# Altium PCB convertpcb.PcbDoc
Units mm, origin at the board's own origin, x right, y up, seen from the top; angles counter-clockwise.
Board outline 30.99 x 32 mm, 2 copper layers (Top Layer, Bottom Layer), stack 1.58 mm thick; 4 components, 19 nets, 70 pads, 0 vias.
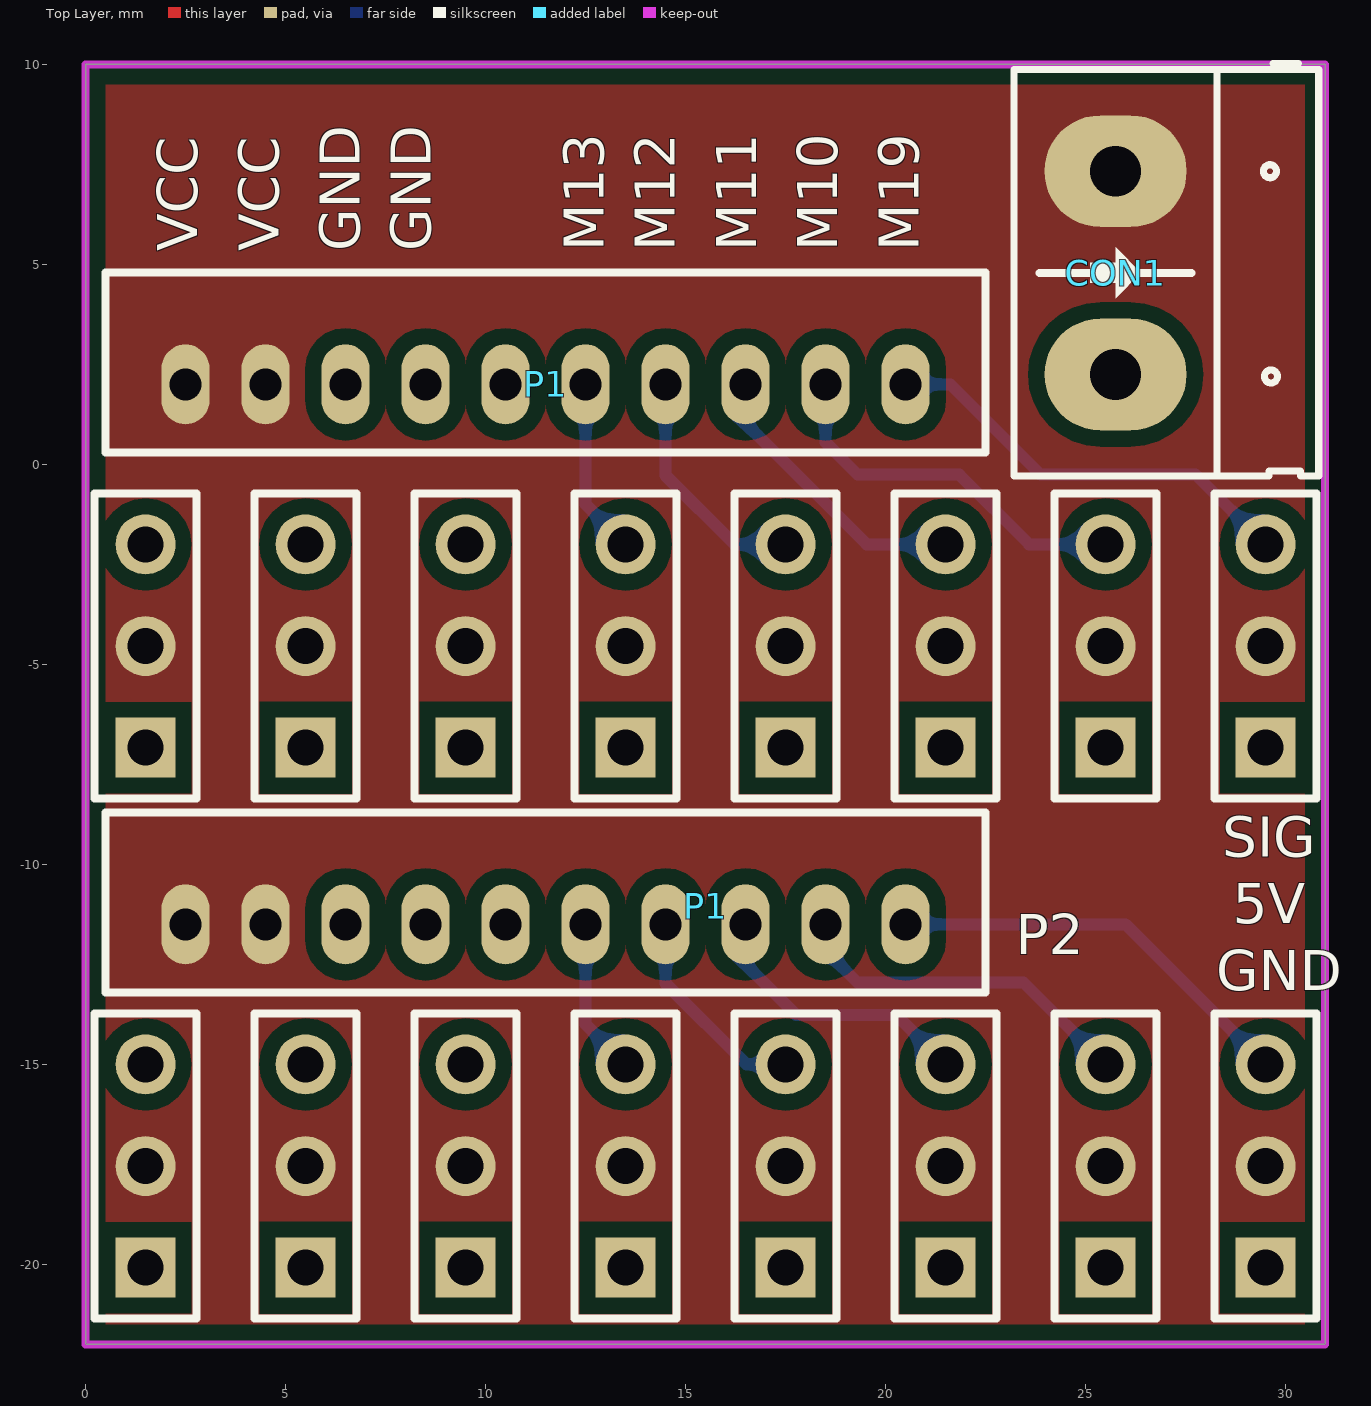
[diagram p0: Top Layer view]
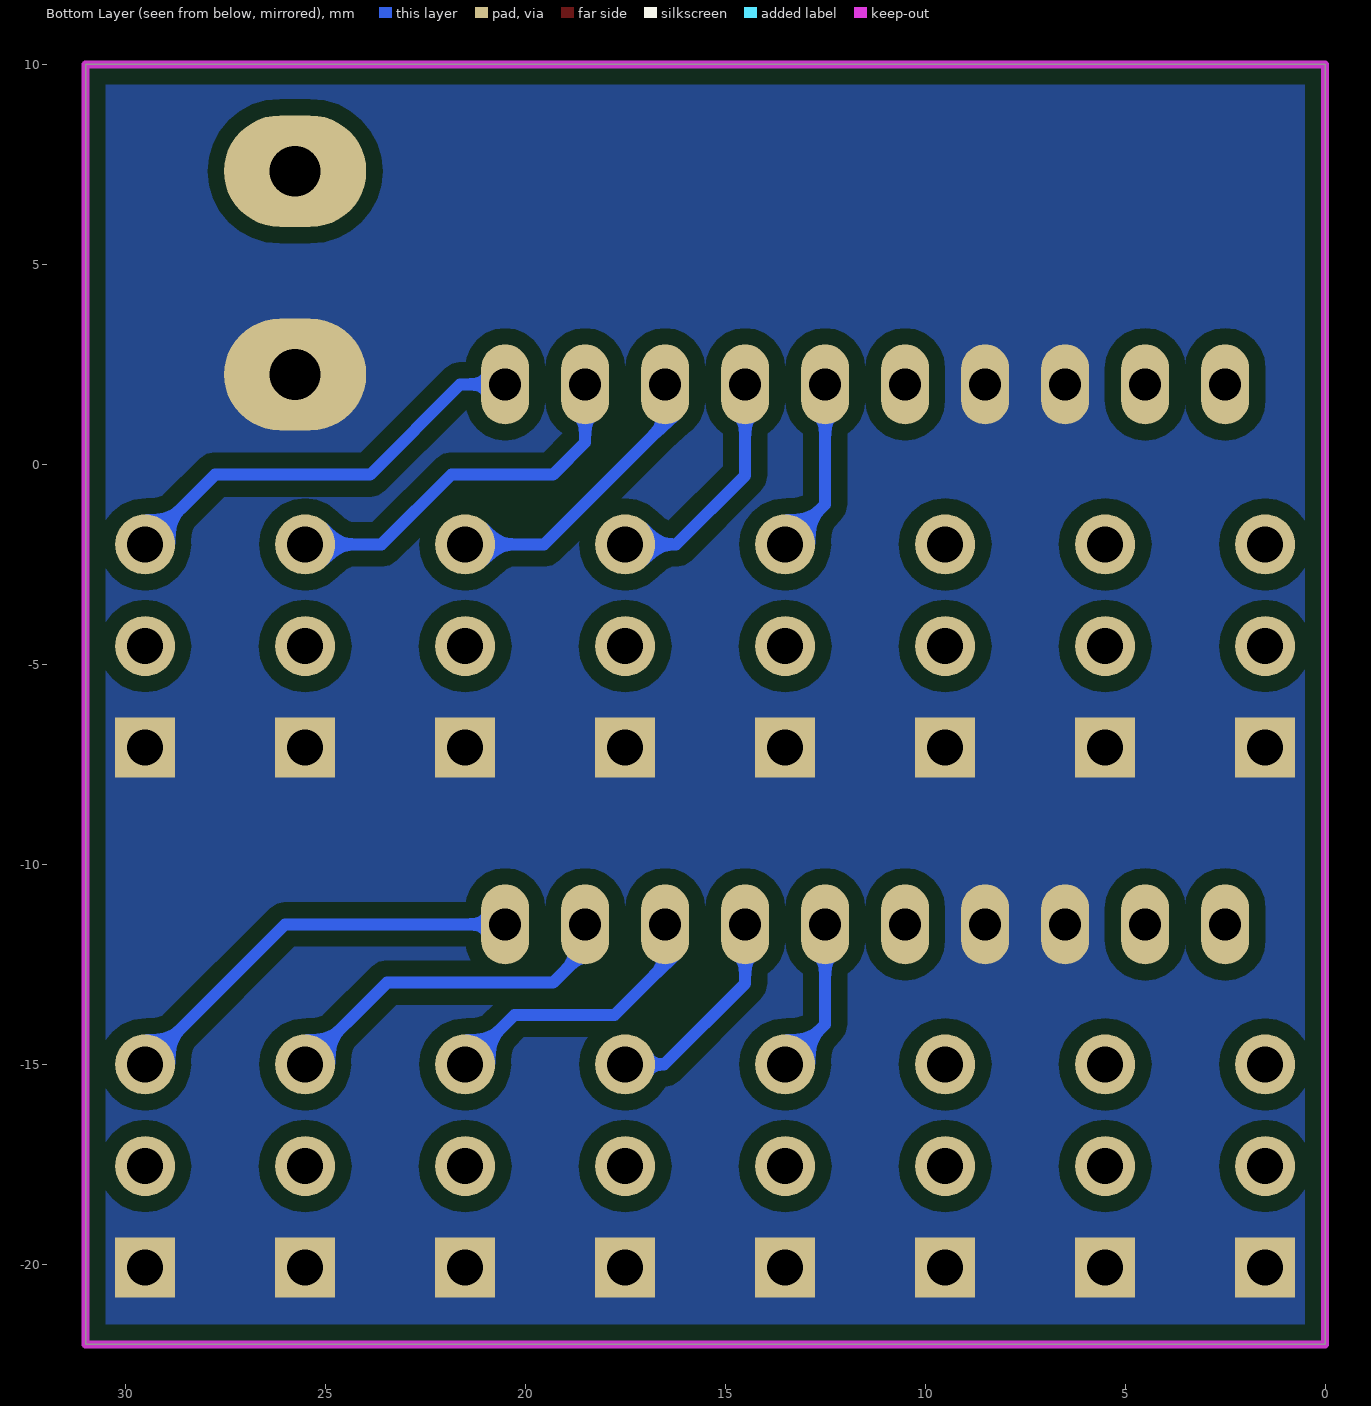
[diagram p1: Bottom Layer view, seen from below]
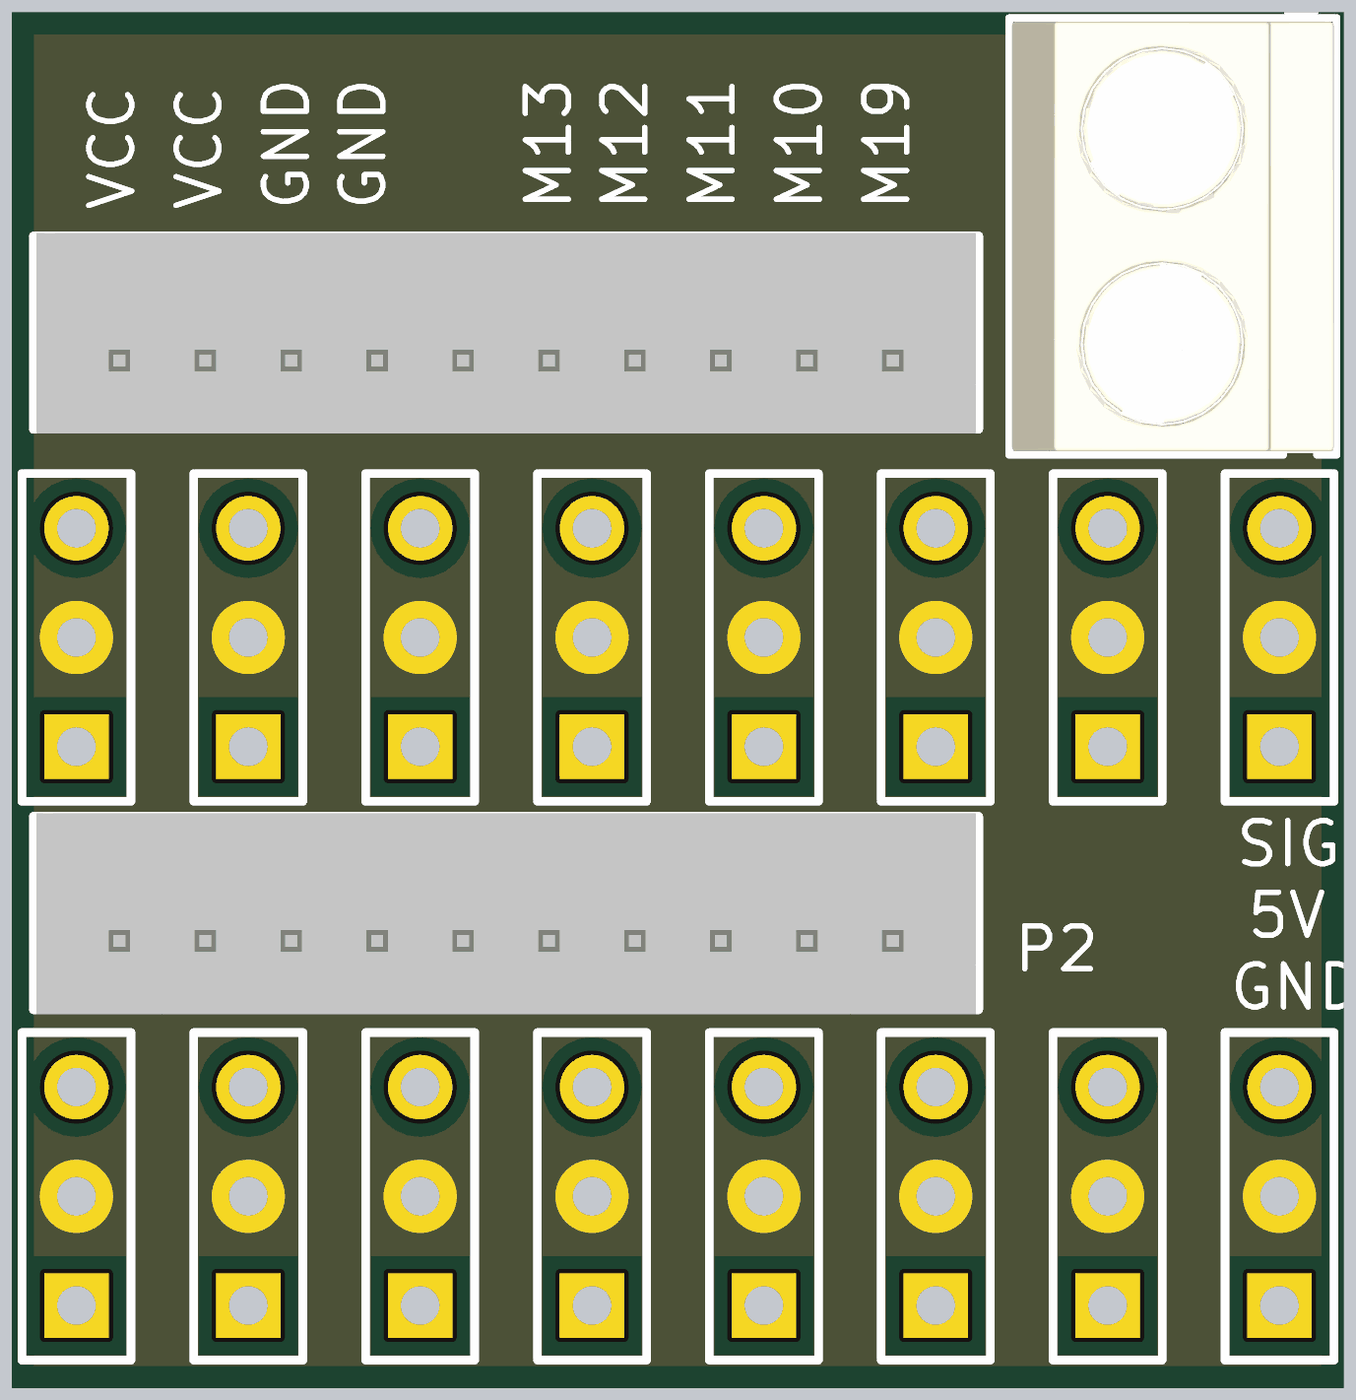
[diagram p2: 3D render of the assembled board from above, using the file's embedded part models]

## Layer stack, top to bottom
Top Solder: solder mask 0.0102, Solder Resist, Dk 3.5
Top Layer: signal copper 0.0356
Dielectric 1: dielectric 1.5086, FR-4, Dk 4.8
Bottom Layer: signal copper 0.0356
Bottom Solder: solder mask 0.0102, Solder Resist, Dk 3.5

## Board outline
0,-22 0,10 30.99,10 30.99,-22

## Design rules (kind name [scope] priority, off if disabled: settings)
Clearance [All] p1: gap=0.4
HoleSize [All] p1: absolutevalues=TRUE maxlimit=5 minlimit=0.01 maxpercent=80.000 minpercent=20.000
MinimumSolderMaskSliver [All] p1: minsoldermaskwidth=0.01
PolygonConnect [All] p1: connectstyle=Direct reliefconductorwidth=0.254 reliefentries=4 polygonreliefangle="90 Angle" airgapwidth=0.254
RoutingVias [All] p1: holewidth=0.3 width=0.6 viastyle="Through Hole" minholewidth=0.3 minwidth=0.6 maxholewidth=5 maxwidth=5
SilkToSilkClearance [All] p1: silktosilkclearance=0.1
SilkToSolderMaskClearance [IsPad] p1: minsilkscreentomaskgap=0.01 clearancetoexposedcopper=TRUE
SolderMaskExpansion [All] p1: expansion=0.102
Width [All] p1: maxlimit=5 minlimit=0.254 preferedwidth=0.254
26 further rules are at their usual default settings.

## Components (designator, comment, footprint, x,y, rotation, side; value= is the part's Value field where it differs from the comment)
CON1 "CON 2 KF301_MH" "CON 2 KF301" 25.75,4.79 r270 top
P1 "OUT" JST-PH2.00-10P 2.5,2 r0 top
P1 "Header 18" Convert_pcb 15.5,-11.04 r0 top locked
P2 "OUT" JST-PH2.00-10P 2.5,-11.5 r0 top

## Footprints (in the part's own frame and the unit in brackets; to place one, negate y for a bottom-side part, rotate by r counter-clockwise, add the part's x,y. Pads: shape width x height; smd on the part's side, far side on the other; paste and mask are expansions set on the pad)
"CON 2 KF301" [mil]
  oval 110x140 hole 50: 1(-100,0) 2(100,0)
  silkscreen extent -206,-100 200,200, body extent -197,-98 197,198, height 394
Convert_pcb [mm]
  rect 1.5x1.5 hole 0.9: 1(-14,-9.04) 1(-14,3.96) 1(-10,-9.04) 1(-10,3.96) 1(-6,-9.04) 1(-6,3.96) 1(-2,-9.04) 1(-2,3.96) 1(2,-9.04) 1(2,3.96) 1(6,-9.04) 1(6,3.96) 1(10,-9.04) 1(10,3.96) 1(14,-9.04) 1(14,3.96)
  round 1.5 hole 0.9: 2(-14,-6.5) 2(-14,6.5) 2(-10,-6.5) 2(-10,6.5) 2(-6,-6.5) 2(-6,6.5) 2(-2,-6.5) 2(-2,6.5) 2(2,-6.5) 2(2,6.5) 2(6,-6.5) 2(6,6.5) 2(10,-6.5) 2(10,6.5) 2(14,-6.5) 2(14,6.5) 3(-14,-3.96) 4(-10,-3.96) 5(-6,-3.96) 6(-2,-3.96) 7(2,-3.96) 8(6,-3.96) 9(10,-3.96) 10(14,-3.96) 11(-14,9.04) 12(-10,9.04) 13(-6,9.04) 14(-2,9.04) 15(2,9.04) 16(6,9.04) 17(10,9.04) 18(14,9.04)
  silkscreen extent -15.27,-10.31 15.27,10.31
JST-PH2.00-10P [mm]
  oval 1.2x2 hole 0.8 paste+0: 1(0,0) 2(2,0) 3(4,0) 4(6,0) 5(8,0) 6(10,0) 7(12,0) 8(14,0) 9(16,0) 10(18,0)
  silkscreen extent -2,-1.7 20,2.8, body extent -1.93,-1.8 19.93,2.87, height 5.89

## Part data
CON1: "CON 2 KF301, 5.08mm"
P1 P2: library part "Header 10", "Header, 10-Pin"
P1: "Header, 18-Pin"

## Nets (pads, with @x,y where several pads share a name; then routed paths per layer and width w, separated by ;. In a path a pad name is that pad's centre, name@x,y a point inside that pad or via, vN(x,y) a via of type N, cw(c..) or ccw(c..) an arc to the next point about the centre after c; other vN are vias at no path point)
5V: CON1.1 P1.1@2.5,2 P1.2 P2.1 P2.2
DETS: P1.5@10.5,2
GND: CON1.2 P1.1@1.5,-7.08 P1.1@1.5,-20.08 P1.1@5.5,-7.08 P1.1@5.5,-20.08 P1.1@9.5,-7.08 P1.1@9.5,-20.08 P1.1@13.5,-7.08 P1.1@13.5,-20.08 P1.1@17.5,-7.08 P1.1@17.5,-20.08 P1.1@21.5,-7.08 P1.1@21.5,-20.08 P1.1@25.5,-7.08 P1.1@25.5,-20.08 P1.1@29.5,-7.08 P1.1@29.5,-20.08 P1.3@6.5,2 P1.4@8.5,2 P2.3 P2.4
M1: P1.10@29.5,-15 P2.10 | length 10.4
  Bottom Layer w0.3: P2.10 26,-11.5 P1.10@29.5,-15
M2: P1.9@25.5,-15 P2.9 | length 8.8
  Bottom Layer w0.3: P2.9 18.5,-12.15 19.304,-12.954 23.454,-12.954 P1.9@25.5,-15
M3: P1.8@21.5,-15 P2.8 | length 7
  Bottom Layer w0.3: P2.8 16.5,-12.5 17.762,-13.762 20.262,-13.762 P1.8@21.5,-15
M4: P1.7@17.5,-15 P2.7 | length 5.3
  Bottom Layer w0.3: P2.7 14.5,-12.976 16.524,-15 P1.7@17.5,-15
M5: P1.6@13.5,-15 P2.6 | length 3.9
  Bottom Layer w0.3: P2.6 12.5,-14 P1.6@13.5,-15
M6: P1.5@9.5,-15
M7: P1.4@5.5,-15
M8: P1.3@1.5,-15
M9: P1.10@20.5,2 P1.18 | length 10.7
  Bottom Layer w0.3: P1.10@20.5,2 21.622,2 23.876,-0.254 27.754,-0.254 P1.18
M10: P1.9@18.5,2 P1.17 | length 9.5
  Bottom Layer w0.3: P1.9@18.5,2 18.5,0.55 19.304,-0.254 21.844,-0.254 23.59,-2 P1.17
M11: P1.8@16.5,2 P1.16 | length 7.2
  Bottom Layer w0.3: P1.8@16.5,2 16.5,1.026 19.526,-2 P1.16
M12: P1.7@14.5,2 P1.15 | length 6
  Bottom Layer w0.3: P1.7@14.5,2 14.5,-0.276 16.224,-2 P1.15
M13: P1.6@12.5,2 P1.14 | length 4.4
  Bottom Layer w0.3: P1.6@12.5,2 12.5,-1 P1.14
M14: P1.13
M15: P1.12
M16: P1.11
pads on no net: P2.5

## Polygon pours and split planes (outlines as drawn)
GND on Bottom Layer "Bottom Layer-No Net" (solid, pour order 3): 0,10 30.988,10 30.988,-21.998 30.99,-22 0,-22
5V on Top Layer "Bottom Layer-No Net" (solid, pour order 5): 0,10 0,-22 30.99,-22 30.99,10

## Keep-outs
Keep-Out Layer:
  lines w0.2: 0,-22 0,0 0,10 30.99,10 30.99,0 30.99,-22 0,-22

## Silkscreen, mask and mechanical layers (free items; w line width, h text height)
Top Overlay:
  text "VCC" at 2.794,5.334 h1 r90
  text "VCC" at 4.826,5.334 h1 r90
  text "GND" at 6.858,5.334 h1 r90
  text "GND" at 8.636,5.334 h1 r90
  text "M13" at 12.954,5.334 h1 r90
  text "M12" at 14.732,5.334 h1 r90
  text "M11" at 16.764,5.334 h1 r90
  text "M10" at 18.796,5.334 h1 r90
  text "M19" at 20.828,5.334 h1 r90
Mechanical 3:
  circle w0.013: c15.415,15.849 r0.5
  circle w0.013: c17.955,15.849 r0.5
  circle w0.013: c12.875,15.849 r0.5
  circle w0.013: c18.945,8.529 r0.6
  circle w0.013: c11.885,8.529 r0.6
  lines w0.013: 10.385,3.529 20.445,3.529 20.445,13.529 10.385,13.529 10.385,3.529 ; 10.63,2.894 10.63,5.304 12.58,5.304 12.58,2.894 10.63,2.894 ; 10.63,11.754 10.63,14.164 12.58,14.164 12.58,11.754 10.63,11.754 ; 13.17,2.894 13.17,5.304 15.12,5.304 15.12,2.894 13.17,2.894 ; 13.17,11.754 13.17,14.164 15.12,14.164 15.12,11.754 13.17,11.754 ; 15.71,2.894 15.71,5.304 17.66,5.304 17.66,2.894 15.71,2.894 ; 15.71,11.754 15.71,14.164 17.66,14.164 17.66,11.754 15.71,11.754 ; 18.25,2.894 18.25,5.304 20.2,5.304 20.2,2.894 18.25,2.894 ; 18.25,11.754 18.25,14.164 20.2,14.164 20.2,11.754 18.25,11.754

## Text inside footprints (layer, text, board x,y; h text height)
P1: Top Overlay "GND" at 28.273,-13.141 h1; Top Overlay "5V" at 28.68,-11.472 h1; Top Overlay "SIG" at 28.418,-9.807 h1